# Altium PCB WSN.PcbDoc
Units mm, origin at the board's own origin, x right, y up, seen from the top; angles counter-clockwise.
Board outline 103.74 x 65.14 mm, 2 copper layers (Top Layer, Bottom Layer); 46 components, 39 nets, 171 pads, 8 vias.
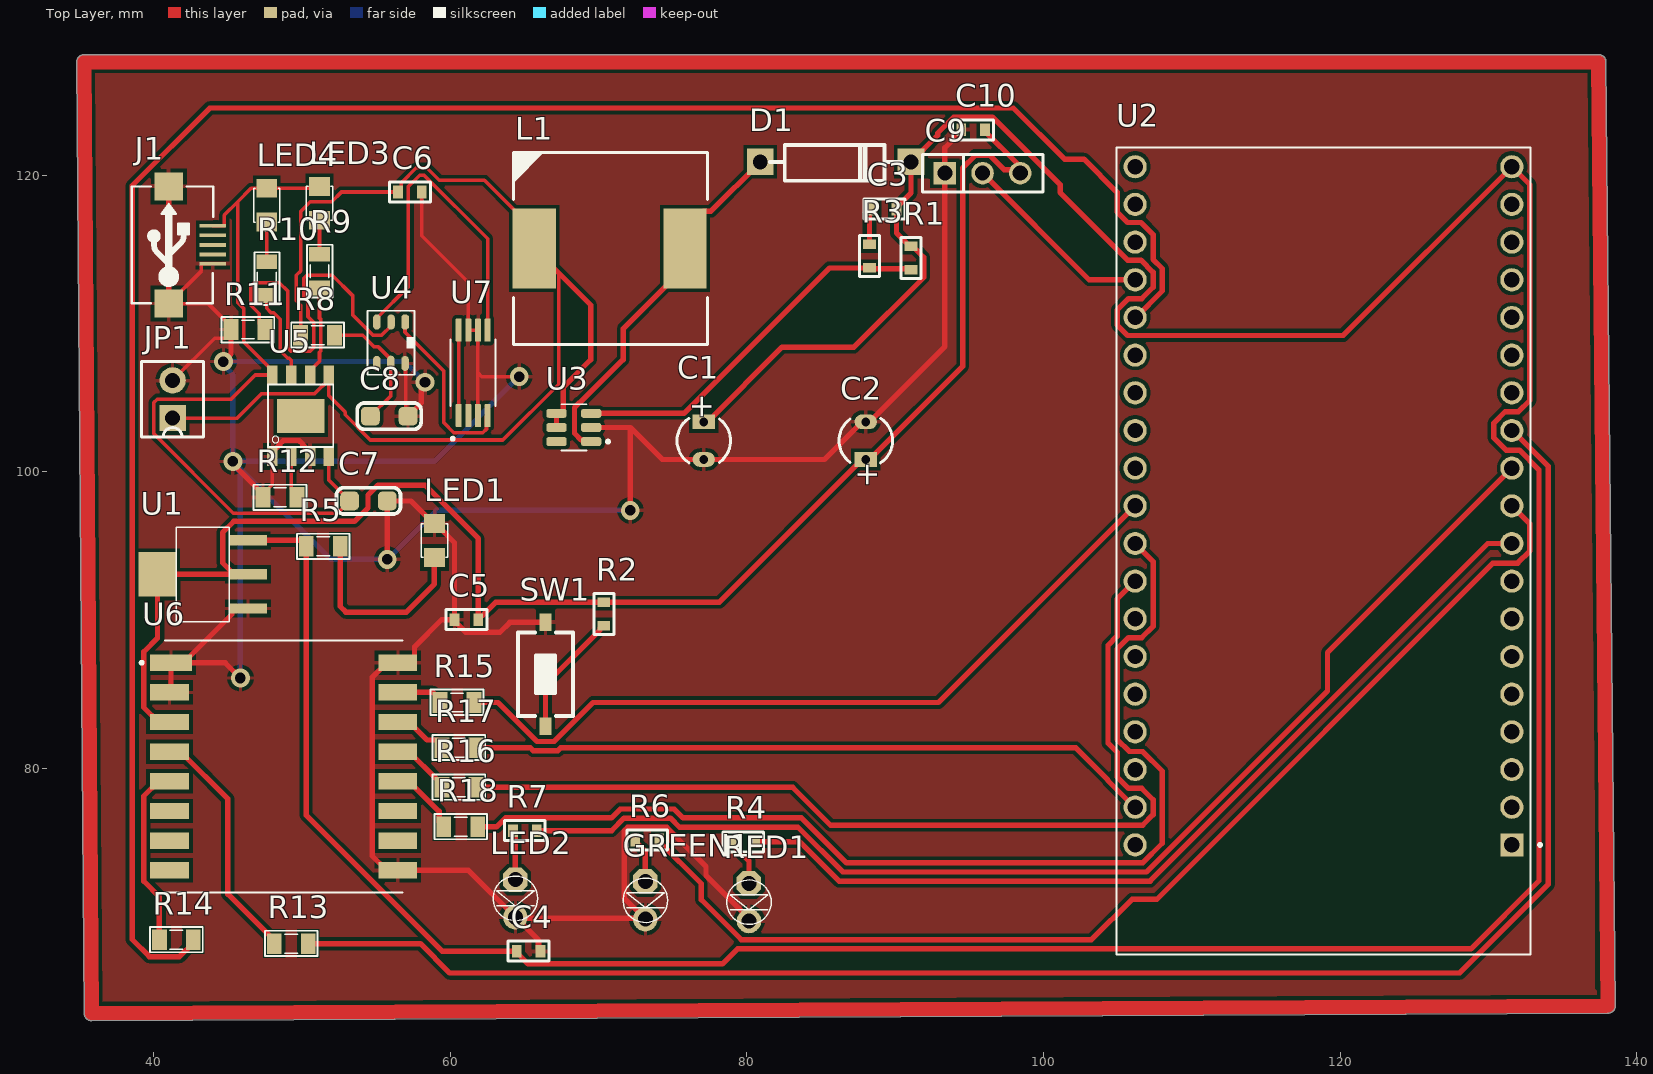
[diagram p0: Top Layer view]
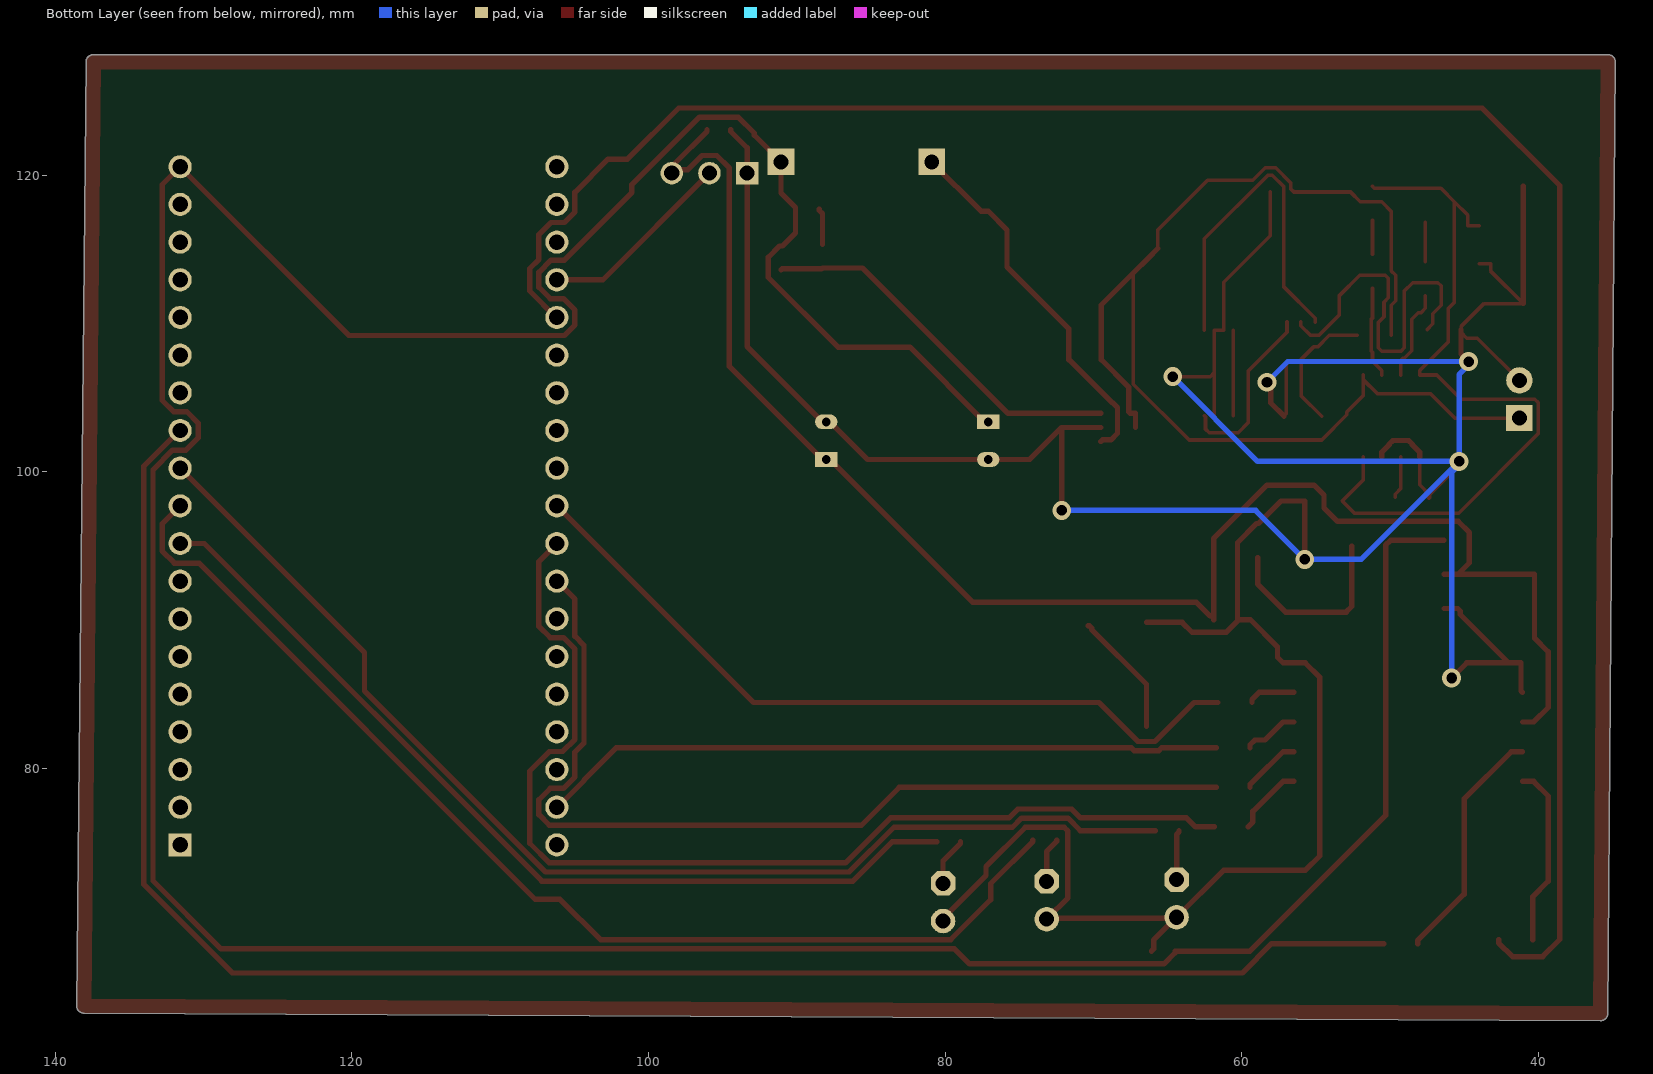
[diagram p1: Bottom Layer view, seen from below]
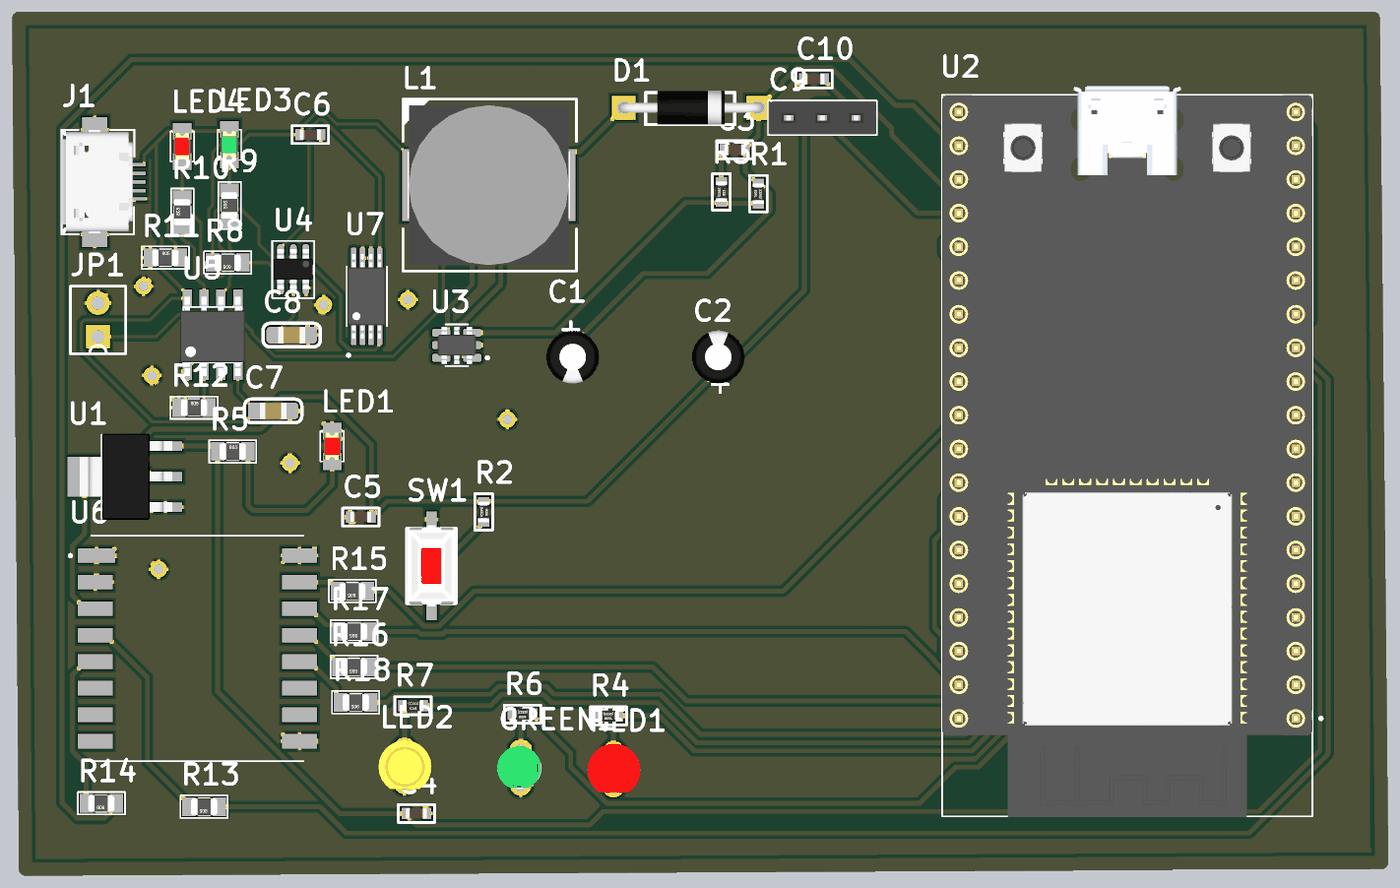
[diagram p2: 3D render of the assembled board from above, using the file's embedded part models]

## Layer stack, top to bottom
Top Solder: solder mask 0.0102, Solder Resist, Dk 3.5
Top Layer: signal copper 0.0356
Dielectric 1: dielectric 0.32, FR-4, Dk 4.8
Bottom Layer: signal copper 0.0356
Bottom Solder: solder mask 0.0102, Solder Resist, Dk 3.5

## Board outline
35.314,63.496 34.806,127.631 cw(c35.306,127.635) 35.306,128.135 137.414,128.135 cw(c137.414,127.635) 137.914,127.639 138.549,64.014 138.549,64.008 cw(c138.049,64.008) 138.051,63.508 35.816,63 cw(c35.814,63.5)

## Design rules (kind name [scope] priority, off if disabled: settings)
Clearance [All] p1: gap=0.254 ignorepadtopadclearanceinfootprint=FALSE except(0: Arc-Hole Track-Hole SMDPad-Hole THPad-Hole Via-Hole Fill-Hole Poly-Hole Region-Hole Text-Hole)
PolygonConnect [All] p1: connectstyle=Relief reliefconductorwidth=0.254 reliefentries=4 polygonreliefangle="90 Angle" airgapwidth=0.254
RoutingVias [All] p1: holewidth=0.711 width=1.27 viastyle="Through Hole" minholewidth=0.711 minwidth=1.27 maxholewidth=0.711 maxwidth=1.27
SolderMaskExpansion [All] p1: expansion=0.102 istentingtop=FALSE
Width [All] p1: maxlimit=0.36 minlimit=0.12 preferedwidth=0.24
30 further rules are at their usual default settings.

## Components (designator, comment, footprint, x,y, rotation, side; value= is the part's Value field where it differs from the comment)
C1 "10 uF" C3MM 77.089,102.108 r270 top
C2 "10 uF" C3MM 88.011,102.108 r90 top
C3 "22uF" CAP0603 89.281,117.729 r180 top
C4 "104" CAP0603 65.278,67.691 r0 top
C5 "104" CAP0603 61.087,90.043 r180 top
C6 "22uF" CAP0603 57.277,118.872 r0 top
C7 "10uF" CAP_0805 54.483,98.044 r180 top value=33p
C8 "0.1 uF" CAP_0805 55.88,103.759 r180 top value=33p
C9 "JP3" JP3-C1T 93.345,120.142 r0 top
C10 "104" CAP0603 95.25,123.063 r180 top
D1 "SS54" DIODE/POW/1A 80.899,120.904 r0 top
GREEN1 "LED" LED-3MM-GREEN 73.152,72.39 r270 top value="LED 3 ly Single Colour"
J1 "USB-5" USB-M1 43.989,115.303 r90 top
JP1 "JP2" CON2 41.275,103.632 r180 top value="Connector 2"
L1 "22uH" IND_400_500_212x114_SMD 70.739,115.062 r0 top
LED1 "LED" LED-0805-Red 58.928,94.234 r90 top value="LED 3 ly Single Colour"
LED2 "LED" LED-3MM-YELLOW 64.389,72.517 r270 top value="LED 3 ly Single Colour"
LED3 "LED" LED-0805-Green 51.181,119.253 r270 top value="LED 3 ly Single Colour"
LED4 "LED" LED-0805-Red 47.625,119.126 r270 top value="LED 3 ly Single Colour"
R1 "110K" RES0603 91.059,114.427 r90 top value=1K
R2 "1.1K" RES0603 70.358,90.424 r270 top value=1K
R3 "110K" RES0603 88.265,114.554 r270 top value=1K
R4 "1.1K" RES0603 79.756,75.057 r180 top value=1K
R5 "330" RES-SMD-0805 51.435,94.996 r0 top
R6 "1.1K" RES0603 73.279,75.184 r180 top value=1K
R7 "1.1K" RES0603 65.024,75.819 r180 top value=1K
R8 "100" RES-SMD-0805 51.054,109.22 r180 top
R9 "1k" RES-SMD-0805 51.181,113.538 r90 top
R10 "1k" RES-SMD-0805 47.625,113.03 r90 top
R11 "1k" RES-SMD-0805 46.355,109.601 r0 top
R12 "1.2k" RES-SMD-0805 48.514,98.298 r0 top
R13 "1K" RES-SMD-0805 49.276,68.199 r180 top
R14 "1K" RES-SMD-0805 41.529,68.453 r180 top
R15 "1K" RES-SMD-0805 60.452,84.455 r180 top
R16 "1K" RES-SMD-0805 60.579,78.74 r180 top
R17 "1K" RES-SMD-0805 60.579,81.407 r180 top
R18 "1K" RES-SMD-0805 60.706,76.073 r180 top
RED1 "LED" LED-3MM-RED 80.137,72.263 r270 top value="LED 3 ly Single Colour"
SW1 "SW" SW1-SMD 66.421,86.36 r90 top value="SW chip 2 pin"
U1 "LM1117-ADJ" LM1117-SOP 45.085,93.091 r90 top
U2 "ESP32-DEVKITC-32D" MODULE_ESP32-DEVKITC-32D 118.872,94.615 r180 top
U3 "MT3608" SOT95P280X145-6N 68.326,102.997 r180 top
U4 "DW01A" SOT23-6 56.124,108.6 r270 top
U5 "TP4056" TP4056 49.911,103.784 r90 top
U6 "RA-02_LORA" MODULE_RA-02_LORA 48.768,80.137 r0 top
U7 "FS8205A" FS8205A 61.595,106.68 r90 top

## Footprints (in the part's own frame and the unit in brackets; to place one, negate y for a bottom-side part, rotate by r counter-clockwise, add the part's x,y. Pads: shape width x height; smd on the part's side, far side on the other; paste and mask are expansions set on the pad)
C3MM [mm]
  rect 1x1.5 hole 0.6: 1(-1.27,0)
  oval 1x1.5 hole 0.6: 2(1.27,0)
  silkscreen extent -1.5,-1.81 1.5,1.8, body extent -2,-2.03 1.99,1.97, height 7.01
CAP0603 [mm]
  rect 0.65x0.85 smd: 1(-0.8,0) 2(0.8,0)
  silkscreen extent -1.38,-0.67 1.38,0.67, body extent -0.8,-0.4 0.8,0.4, height 0.79
CAP_0805 [mm]
  rrect50% 1.27x1.27 smd: 1(-1.27,0) 2(1.27,0)
  silkscreen extent -2.16,-0.89 2.16,0.89, body extent -1.01,-0.64 1.01,0.64, height 0.61
CON2 [mil]
  rect 70x70 hole 39.37 unplated: 1(0,0)
  round 70 hole 39.37 unplated: 2(0,-100)
  silkscreen extent -82,-150 82,50
DIODE/POW/1A [mm]
  rect 1.8x1.8 hole 1: 1(0,0) 2(10.16,0)
  silkscreen extent 0.64,-1.27 9.53,1.14, body extent -0.38,-1.28 10.54,1.28, height 2.55
FS8205A [mm]
  rrect25% 1.56x0.4 smd: 1(-2.88,1.031) 2(-2.88,0.381) 3(-2.88,-0.269) 4(-2.88,-0.919) 5(2.88,-0.919) 6(2.88,-0.269) 7(2.88,0.381) 8(2.88,1.031)
  silkscreen extent -4.54,-1.46 2.25,1.57, body extent -3.2,-1.4 3.2,1.53, height 1.2
IND_400_500_212x114_SMD [mm] "wurth inductor"
  rect 2.9x5.4 smd: 1(-5.08,0) 2(5.08,0)
  silkscreen extent -6.48,-6.48 6.6,6.48, body extent -6.12,-6.02 6.13,6.03, height 8.1
JP3-C1T [mm]
  rect 1.52x1.52 hole 1.02: 1(0,0)
  round 1.52 hole 1.02: 2(2.54,0) 3(5.08,0)
  silkscreen extent -1.52,-1.27 6.6,1.27, body extent -1.52,-1.25 6.6,1.25, height 8.51
LED-3MM-GREEN [mil]
  oct 65x65 hole 40: 1(0,0)
  round 65 hole 40: 2(100,0)
  silkscreen extent -9,-59 109,59, body extent -15,-70 112,60, height 182
LED-3MM-RED [mil]
  oct 65x65 hole 40: 1(0,0)
  round 65 hole 40: 2(100,0)
  silkscreen extent -9,-59 109,59, body extent -27,-77 117,80, height 181
LED-3MM-YELLOW [mil]
  oct 65x65 hole 40: 1(0,0)
  round 65 hole 40: 2(100,0)
  silkscreen extent -9,-59 109,59, body extent -27,-77 117,80, height 181
LED-0805-Green [mil]
  rect 50x55 smd: 1(0,0) 2(90,0)
  silkscreen extent 0,-35 90,35, body extent 5,-25 85,25, height 43
LED-0805-Red [mil]
  rect 50x55 smd: 1(0,0) 2(90,0)
  silkscreen extent 0,-35 90,35, body extent 5,-25 85,25, height 43
LM1117-SOP [mm]
  rect 0.7x2.54 smd: 1(-2.3,-1.27) 2(0,-1.27) 3(2.3,-1.27)
  rect 3x2.54 smd: 2(0,4.826)
  silkscreen extent -3.18,0 3.17,3.56, body extent -3.25,-1.78 3.25,5.18, height 1.68
MODULE_ESP32-DEVKITC-32D [mm]
  rect 1.56x1.56 / inner round 1.56 / far side rect 1.56x1.56 hole 1.04: J2-1(-12.7,19.76)
  round 1.56 hole 1.04: J2-2(-12.7,17.22) J2-3(-12.7,14.68) J2-4(-12.7,12.14) J2-5(-12.7,9.6) J2-6(-12.7,7.06) J2-7(-12.7,4.52) J2-8(-12.7,1.98) J2-9(-12.7,-0.56) J2-10(-12.7,-3.1) J2-11(-12.7,-5.64) J2-12(-12.7,-8.18) J2-13(-12.7,-10.72) J2-14(-12.7,-13.26) J2-15(-12.7,-15.8) J2-16(-12.7,-18.34) J2-17(-12.7,-20.88) J2-18(-12.7,-23.42) J2-19(-12.7,-25.96) J3-1(12.7,19.76) J3-2(12.7,17.22) J3-3(12.7,14.68) J3-4(12.7,12.14) J3-5(12.7,9.6) J3-6(12.7,7.06) J3-7(12.7,4.52) J3-8(12.7,1.98) J3-9(12.7,-0.56) J3-10(12.7,-3.1) J3-11(12.7,-5.64) J3-12(12.7,-8.18) J3-13(12.7,-10.72) J3-14(12.7,-13.26) J3-15(12.7,-15.8) J3-16(12.7,-18.34) J3-17(12.7,-20.88) J3-18(12.7,-23.42) J3-19(12.7,-25.96)
  silkscreen extent -14.7,-27.25 13.95,27.15, body extent -13.97,-27.9 13.97,27.2, height 6.69
MODULE_RA-02_LORA [mm]
  rect 2.8x1.1 smd: 1(-7.6,7)
  rect 2.6x1.1 smd: 2(-7.7,5) 3(-7.7,3) 4(-7.7,1) 5(-7.7,-1) 6(-7.7,-3) 7(-7.7,-5) 8(-7.7,-7) 9(7.7,-7) 10(7.7,-5) 11(7.7,-3) 12(7.7,-1) 13(7.7,1) 14(7.7,3) 15(7.7,5) 16(7.7,7)
  silkscreen extent -9.68,-8.5 8,8.5
RES0603 [mm]
  rect 0.65x0.85 smd: 1(-0.8,0) 2(0.8,0)
  silkscreen extent -1.38,-0.67 1.38,0.67, body extent -0.78,-0.42 0.77,0.43, height 0.45
RES-SMD-0805 [mil]
  rect 39.37x55 smd: 1(-45,0) 2(45,0)
  silkscreen extent -70,-34 70,33, body extent -39,-25 39,25, height 31
SOT23-6 [mil]
  oct 40x20 smd: 1(-59.41,32.4)
  oval 40x20 smd: 2(-59.41,-4.6) 3(-59.41,-42.6) 4(50.59,-42.6) 5(50,-5) 6(50.59,32.4)
  silkscreen extent -89,-68 81,57, body extent -64,-64 54,54, height 51
SOT95P280X145-6N [mm]
  rrect50% 1.37x0.59 smd: 1(-1.17,0.95) 2(-1.17,0) 3(-1.17,-0.95) 4(1.17,-0.95) 5(1.17,0) 6(1.17,0.95)
  silkscreen extent -2.4,-1.57 0.85,1.57, body extent -1.45,-1.4 1.45,1.4, height 1.45
SW1-SMD [mm]
  rect 1.2x0.8 smd: 1(-3.5,0) 2(3.5,0)
  silkscreen extent -2.82,-1.85 2.82,1.85, body extent -3.05,-1.85 3.05,1.85, height 2.5
TP4056 [mm]
  rect 1.3x0.7 smd: 1(-2.75,1.905) 2(-2.75,0.635) 3(-2.75,-0.635) 4(-2.75,-1.905) 5(2.75,-1.905) 6(2.75,-0.635) 7(2.75,0.635) 8(2.75,1.905)
  rect 2.3x3.2 smd: GND(-0.025,0)
  silkscreen extent -2.1,-2.2 2.1,2.2, body extent -3.13,-2.45 2.87,2.45, height 1.75
USB-M1 [mil]
  rect 10x70 smd: 1(51.18,0) 2(25.59,0) 3(0,0) 4(-25.59,0) 5(-50,0)
  rect 74.8x74.8 smd: 5(-155.51,116.84) 5(155.51,116.84)
  silkscreen extent -155,-1 155,215, body extent -157,5 158,218, height 107

## Part data
C1 C2: library part "Cap Pol", "Polarized Capacitor (Axial)", LatestRevisionDate=17-Jul-2002, LatestRevisionNote="Re-released for DXP Platform.", PackageReference=POLAR0.8, Published=8-Jun-2000, Publisher="Altium Limited"
C3 C4 C5 C6 C10: library part CC0603JRNPO9BN300, "CAP CER 30PF 50V NPO 0603", Manufacturer=Yageo, Operating Temperature="-55°C ~ 125°C", Package / Case="0603 (1608 Metric)", Ratings=-, Supplier Part Number 1=311-3357-1-ND, Temperature Coefficient="C0G, NP0", Tolerance=±5%, Voltage - Rated=50V, Applications="General Purpose", Category=Capacitors, ComponentLink1Description=http://www.yageo.com/documents/recent/UPY-GP_NP0_16V-to-50V_16.pdf, ComponentLink1URL=http://www.yageo.com/documents/recent/UPY-GP_NP0_16V-to-50V_16.pdf, Failure Rate=-, Features=-, Height - Seated (Max)=-, Lead Spacing=-, Lead Style=-, Manufacturer Part Number=CC0603JRNPO9BN300, Mounting Type="Surface Mount, MLCC", Notification="Current market demand for these product types have resulted in fluctuating and extending lead times. Lead times may differ.", Packaging="Cut Tape (CT)", Part Status=Active, Pricing 1="1=0.1, 10=0.041, 100=0.0182, 500=0.01302, 1000=0.01022 (USD)", RoHS="RoHS Compliant", Size / Dimension="0.063\" L x 0.032\" W (1.60mm x 0.80mm)", Stock 1=0, Supplier 1=Digi-Key, Thickness (Max)="0.035\" (0.90mm)"
C7 C8: library part CapSMD, "Capacitor", LatestRevisionDate=17-Jul-2002, LatestRevisionNote="Re-released for DXP Platform.", PackageReference=RAD-0.3, Published=8-Jun-2000, Publisher="Altium Limited"
C9: "WR-PHD 2.54 mm Angled Socket Header", Manufacturer="W¨¹rth Elektronik eiSos GmbH", partNo=613003143121, ComponentLink1 Description=Manufacturer, ComponentLink1URL=http://www.we-online.com, ComponentLink2 Description=Datasheet, ComponentLink2URL=http://katalog.we-online.de/em/datasheet/6130xx143121.pdf, Created by="Karrer Zheng", Created Date="29 March 2013", NoPins=03
D1: library part "Diode Power", "Diode Power", PackageDocument=Aug-1999, ComponentLink1Description="Manufacturer Link", ComponentLink1URL=http://www.fairchildsemi.com/, ComponentLink2Description=Datasheet, ComponentLink2URL=http://www.fairchildsemi.com/ds/1N%2F1N5400.pdf, DatasheetDocument=1998, LatestRevisionDate=17-Jul-2002, LatestRevisionNote="Re-released for DXP Platform.", PackageReference=DO-201AD, Published=8-Jun-2000, Publisher="Altium Limited"
GREEN1 LED1 LED2 LED3 LED4 RED1: "LED Single colour Green and Red"
J1: Manufacturer=FCI, Manufacturer Part Number=10118193-0001LF, Supplier Part Number 1=609-4616-1-ND, .Checked PCB=RF, .Checked SCH=MM, .Creator=MM, Category="Connectors, Interconnects", ComponentLink1Description=http://portal.fciconnect.com/Comergent//fci/drawing/10118193.pdf, ComponentLink1URL=http://portal.fciconnect.com/Comergent//fci/drawing/10118193.pdf, Connector Type="USB - micro B", Features="Shielded, Solder Retention", Gender=Receptacle, Ingress Protection=-, Mounting Type="Surface Mount, Right Angle, Horizontal", Number of Contacts=5, Packaging="Cut Tape (CT)", Pricing 1="1=0.46, 10=0.433, 25=0.3712, 50=0.3156, 100=0.3032, 250=0.27224, 500=0.25988 (USD)", RoHS="RoHS Compliant", Specifications="USB 2.0", Stock 1=28642, Supplier 1=Digi-Key
JP1: library part Con2, "Connector 2"
L1: library part IND_1mH-0.6A-20%-SMD, "1mH Shielded Wirewound Inductor 600mA 1.82Ohm Max Nonstandard", Alternate Part Number-1=NA, Case/Package=SMD, Manufacturer=Coilcraft, Manufacturer Part Number=74477030, Supplier Part Number-1=74477030, Supplier-1=WURTH
R1 R2 R3 R4 R6 R7: library part RT0603FRD071KL, "RES SMD 1K OHM 1% 1/10W 0603", Manufacturer=Yageo, Operating Temperature="-55°C ~ 155°C", Package / Case="0603 (1608 Metric)", Power (Watts)="0.1W, 1/10W", Supplier Device Package=0603, Supplier Part Number 1=YAG5719CT-ND, Temperature Coefficient=±25ppm/°C, Tolerance=±1%, Category=Resistors, ComponentLink1Description=http://www.yageo.com/documents/recent/PYu-RT_1-to-0.01_RoHS_L_9.pdf, ComponentLink1URL=http://www.yageo.com/documents/recent/PYu-RT_1-to-0.01_RoHS_L_9.pdf, Composition="Thin Film", Failure Rate=-, Features="Moisture Resistant", Height - Seated (Max)="0.022\" (0.55mm)", Manufacturer Part Number=RT0603FRD071KL, Packaging="Cut Tape (CT)", Part Status=Active, Pricing 1="1=0.17, 10=0.143, 100=0.0561, 1000=0.02346, 2500=0.02151 (USD)", RoHS="RoHS Compliant", Size / Dimension="0.063\" L x 0.032\" W (1.60mm x 0.80mm)", Stock 1=0, Supplier 1=Digi-Key
R5 R8 R9 R10 R11 R12 R13 R14 R15 R16 R17 R18: library part "Resistor - SMD", "Resistor", Manufacturer="Generic Components", Class=Passive, Published=08/06/2000, Publisher="Altium Hobart Technology Centre"
SW1: library part SW2, "Switch button 2 pin"
U1: "800mA Low-Dropout Linear Regulator", Creator="Nguyen Ba Bien", Website=http://group3i.net
U2: "WiFi Development Tools (802.11) ESP32 General Development Kit, ESP32-WROOM-32D on the board", Package=None, Check_prices=https://www.snapeda.com/parts/ESP32-DEVKITC-32D/Espressif+Systems/view-part/?ref=eda, MF="Espressif Systems", MP=ESP32-DEVKITC-32D, SnapEDA_Link=https://www.snapeda.com/parts/ESP32-DEVKITC-32D/Espressif+Systems/view-part/?ref=snap
U3: "High Efficiency 1.2MHz2A Step Up Converter", Package=Package, Availability="Not in stock", Check_prices=https://www.snapeda.com/parts/MT3608/Aerosemi+Technology+Co.%252C+Ltd/view-part/?ref=eda, MF="Aerosemi Technology Co., Ltd", MP=MT3608, Price=None, SnapEDA_Link=https://www.snapeda.com/parts/MT3608/Aerosemi+Technology+Co.%252C+Ltd/view-part/?ref=snap
U4: "One Cell Lithium-ion/Polymer Battery Protection IC"
U5: "Complete single cell Li-Ion battery with a constant current / constant voltage linear charger"
U6: "Ra-02 LoRa RF M5Stack Platform Evaluation Expansion Board", Package=None, Availability=Unavailable, MP=RA-02_LORA, Price=None

## Via types
v1: diameter 1.27, hole 0.711, Top Layer to Bottom Layer, 8 vias

## Nets (pads, with @x,y where several pads share a name; then routed paths per layer and width w, separated by ;. In a path a pad name is that pad's centre, name@x,y a point inside that pad or via, vN(x,y) a via of type N, cw(c..) or ccw(c..) an arc to the next point about the centre after c; other vN are vias at no path point)
3V3: C2.1 C5.1 C9.3 C10.1 R2.1 U1.2 U6.3 | length 107.7
  Top Layer w0.36: U6.3 40.318,83.137 39.334,84.121 39.334,87.867 40.259,88.792 40.259,93.091 U1.2@45.435,93.091 ; U1.2@46.355,93.091 U1.2@45.435,93.091 ; C5.1 C5.1@61.887,90.143 ; C10.1 96.05,122.963 C9.3@98.203,120.81 ; C9.3 98.203,120.364 97.352,120.364 96.38,121.336 95.39,121.336 94.539,120.485 94.539,107.116 88.261,100.838 C2.1 87.761,100.838 78.147,91.224 R2.1 63.068,91.224 62.132,90.288 62.032,90.288 C5.1@61.887,90.143 ; U1.2@45.435,93.091 44.651,93.875 44.651,95.921 45.402,96.672 53.538,96.672 54.446,97.579 54.446,98.435 55.124,99.113 58.282,99.113 61.887,95.508 C5.1@61.887,90.143
5V: C1.1 C3.1 C4.1 D1.2 R1.2 R5.1 U1.3 U2.J2-19 | length 250.8
  Top Layer w0.36: U1.3 49.972,95.391 50.292,95.071 R5.1 50.292,76.849 59.45,67.691 C4.1 64.478,67.591 65.237,66.832 78.343,66.832 79.361,67.85 128.81,67.85 133.4,72.44 133.4,100.144 132.075,101.469 131.181,101.469 130.358,102.292 130.358,103.298 131.125,104.065 132.019,104.065 132.786,104.832 132.786,119.361 U2.J2-19 120.198,109.201 105.669,109.201 104.958,109.912 104.958,110.918 105.725,111.685 106.619,111.685 107.386,112.452 107.386,113.458 106.563,114.281 105.669,114.281 101.112,118.838 101.112,119.365 96.555,123.922 93.945,123.922 92.862,122.839 92.862,122.707 D1.2 91.059,118.807 90.081,117.829 C3.1 90.081,116.105 90.959,115.227 R1.2 91.159,115.227 91.918,114.468 91.918,113.122 87.206,108.41 82.371,108.41 77.339,103.378 C1.1
Data: C9.2 U2.J3-16 | length 13.3
  Top Layer w0.36: C9.2 103.072,112.955 U2.J3-16
DIO0: R14.2 U6.5 | length 12.3
  Top Layer w0.36: R14.2 40.386,71.355 39.334,72.407 39.334,78.153 40.318,79.137 U6.5
GND: C1.2 C2.2 C4.2 C5.2 C6.2 C7.1 C8.1 C9.1 C10.2 GREEN1.2 J1.5 JP1.2 LED1.2 LED2.2 R11.1 R12.1 RED1.2 SW1.2 U1.1 U3.2 U4.6 U5.1 U5.3 U6.1 U6.2 U6.9 U6.16 U7.2 U7.3 U7.6 U7.7 | length 293.1
  Top Layer w0.24: JP1.2 44.125,109.022 44.832,109.022 R11.1@45.212,109.403 ; J1.5@43.989,114.033 43.227,114.033 43.22,114.026 43.22,113.552 41.021,111.353 43.658,111.353 45.212,109.799 R11.1 ; R12.1@47.371,98.496 48.006,99.132 U5.1 ; U4.6 56.998,107.264 C8.1@56.998,103.911 ; C6.2 58.077,115.924 61.214,112.787 U7.7 U7.6 61.864,106.68 ; U7.3 61.864,106.68 ; v1(64.643,106.426) 62.118,106.426 61.864,106.68
  Top Layer w0.36: J1.5@41.021,111.353 J1.5@41.021,119.253 ; U6.2 41.168,85.237 U6.1 U6.1@42.018,87.137 ; v1(44.704,107.442) 45.212,107.95 45.212,109.403 R11.1 ; v1(45.339,100.711) 45.339,100.528 47.371,98.496 R12.1 ; v1(45.847,86.106) 44.816,87.137 U6.1@42.018,87.137 ; U1.1 45.435,90.791 45.265,90.621 45.265,90.384 U6.1@42.018,87.137 ; U5.1 48.006,101.334 48.492,101.82 48.492,101.864 48.746,102.118 49.806,102.118 50.06,101.864 50.06,101.82 50.546,101.334 U5.3 ; v1(55.753,94.107) C7.1 57.34,98.044 58.864,96.52 LED1.2 58.991,96.52 60.287,95.225 C5.2 ; C8.1 58.039,104.648 58.039,105.537 v1@58.166,105.664 ; C4.2 65.933,67.836 65.933,68.433 LED2.2@64.453,69.913 ; SW1.2 64.012,89.86 63.335,89.184 61.046,89.184 60.287,89.943 C5.2 ; U3.2 72.135,102.997 ; v1(72.136,97.409) 72.135,102.997 ; GREEN1.2 GREEN1.2@73.088,69.913 ; RED1.2 80.137,69.894 77.237,72.794 77.237,73.39 74.584,76.043 71.974,76.043 71.72,75.789 71.72,71.282 GREEN1.2@73.088,69.913 ; C10.2 94.45,122.963 93.345,121.858 C9.1 93.345,108.462 88.261,103.378 C2.2 87.761,103.378 85.221,100.838 C1.2 74.294,100.838 72.135,102.997 ; C5.2 59.422,90.043 57.588,88.209 57.588,87.507 57.218,87.137 U6.16 55.718,87.137 54.734,86.153 54.734,74.121 55.718,73.137 U6.9 61.229,73.137 LED2.2 LED2.2@64.453,69.913 ; LED2.2@64.453,69.913 GREEN1.2@73.088,69.913
  Bottom Layer w0.36: v1(45.847,86.106) 45.847,99.957 45.339,100.465 v1(45.339,100.711) ; v1(58.293,106.045) 56.896,107.442 v1(44.704,107.442) 44.704,107.196 45.339,106.561 v1(45.339,100.711) ; v1(64.643,106.426) 58.928,100.711 v1(45.339,100.711) ; v1(72.136,97.409) 59.055,97.409 v1(55.753,94.107) 51.943,94.107 v1(45.339,100.711)
IO2: R14.1 U2.J3-15 | length 137.9
  Top Layer w0.36: R14.1 42.672,68.255 41.738,67.321 39.706,67.321 38.555,68.472 38.555,119.301 43.79,124.536 97.954,124.536 101.404,121.086 102.719,121.086 104.958,118.847 104.958,117.532 105.669,116.821 106.563,116.821 107.386,115.998 107.386,114.326 108,113.712 108,112.198 106.217,110.415 U2.J3-15
IO5: R15.1 U2.J3-10 | length 52.2
  Top Layer w0.36: R15.1 63.212,84.455 65.841,81.826 67.001,81.826 69.63,84.455 92.912,84.455 U2.J3-10
IO14: R13.1 U2.J2-12 | length 118.5
  Top Layer w0.36: R13.1 57.977,68.199 59.958,66.218 128.046,66.218 134.014,72.186 134.014,100.398 131.617,102.795 U2.J2-12
IO18: R18.1 U2.J3-9 | length 72.7
  Top Layer w0.36: R18.1 63.114,76.073 63.719,76.678 70.873,76.678 71.466,77.271 75.092,77.271 75.685,76.678 83.679,76.678 86.716,73.641 106.675,73.641 108,74.966 108,79.824 106.675,81.149 105.781,81.149 104.958,81.972 104.958,88.058 105.725,88.825 106.619,88.825 107.386,89.592 107.386,93.961 U2.J3-9
IO19: R16.1 U2.J3-8 | length 65.3
  Top Layer w0.36: R16.1 83.079,78.74 85.638,76.181 106.675,76.181 107.386,76.892 107.386,77.898 106.619,78.665 105.725,78.665 104.958,79.432 104.958,81.104 104.344,81.718 104.344,88.312 104.958,88.926 104.958,91.421 U2.J3-8
IO23: R17.1 U2.J3-2 | length 46.3
  Top Layer w0.36: R17.1 65.392,81.407 65.587,81.212 67.255,81.212 67.45,81.407 102.16,81.407 104.344,79.223 104.344,79.178 106.127,77.395 U2.J3-2
MISO: R16.2 U6.13 | length 4.1
  Top Layer w0.36: U6.13 57.218,81.137 59.096,79.259 59.116,79.259 59.436,78.938 R16.2
MOSI: R17.2 U6.14 | length 3.8
  Top Layer w0.36: U6.14 57.218,83.137 58.429,81.926 59.116,81.926 59.436,81.605 R17.2
NetC3_2: C3.2 R3.1 | length 2.5
  Top Layer w0.36: R3.1 88.265,117.413 88.481,117.629 C3.2
NetC8_2: C8.2 R8.1 U4.5 | length 8.9
  Top Layer w0.24: R8.1 54.09,109.22 54.882,108.428 55.153,108.428 55.997,107.584 U4.5 55.997,105.146 C8.2
NetD1_1: D1.1 L1.2 U3.1 | length 25.1
  Top Layer w0.36: U3.1 69.381,102.162 68.824,102.162 68.377,102.609 68.377,104.335 68.718,104.676 68.753,104.676 71.651,107.574 71.651,109.644 75.819,113.812 75.819,116.312 77.089,117.582 77.577,117.582 D1.1
NetGREEN1_1: GREEN1.1 R6.2 | length 3.1
  Top Layer w0.36: R6.2 72.479,75.084 73.152,74.411 GREEN1.1
NetLED1_1: LED1.1 R5.2 | length 13.1
  Top Layer w0.36: R5.2 52.578,90.932 52.959,90.551 57.038,90.551 58.928,92.441 LED1.1
NetLED2_1: LED2.1 R7.2 | length 3.4
  Top Layer w0.36: R7.2 64.224,75.719 64.389,75.554 LED2.1
NetLED3_2: LED3.2 R9.2 | length 2.3
  Top Layer w0.24: R9.2 LED3.2
NetLED4_2: LED4.2 R10.2 | length 2.7
  Top Layer w0.24: R10.2 LED4.2
NetR1_1: R1.1 R3.2 U3.3 | length 25.7
  Top Layer w0.36: U3.3 75.753,103.947 85.56,113.754 R3.2 88.329,113.69 90.995,113.69 R1.1
NetR4_2: R4.2 RED1.1 | length 3.3
  Top Layer w0.36: R4.2 78.956,74.957 80.137,73.776 RED1.1
NetR9_1: R9.1 U5.6 | length 6.2
  Top Layer w0.24: U5.6 50.546,106.834 51.181,107.469 51.181,108.064 51.279,108.162 51.279,110.278 51.181,110.376 R9.1
NetR10_1: R10.1 U5.7 | length 6.2
  Top Layer w0.24: R10.1 47.625,111.027 47.911,110.741 48.086,110.741 48.543,110.283 48.543,108.162 49.052,107.654 49.135,107.654 49.276,107.513 U5.7
NetR11_2: R11.2 U4.2 | length 25.8
  Top Layer w0.24: R11.2 47.118,109.981 47.118,110.667 46.553,111.232 46.553,112.542 46.772,112.761 48.478,112.761 49.037,112.202 49.037,108.367 49.256,108.148 50.566,108.148 50.785,108.367 50.785,110.073 50.405,110.453 50.405,111.444 50.109,111.74 50.109,113.05 50.328,113.269 52.034,113.269 53.408,111.895 53.408,110.601 54.782,109.227 55.379,109.227 56.007,109.855 U4.2
NetR12_2: R12.2 U5.2 | length 2.9
  Top Layer w0.24: U5.2 49.276,98.877 49.657,98.496 R12.2
NetU4_1: U4.1 U7.4 | length 12.1
  Top Layer w0.24: U4.1 56.947,109.423 59.572,106.798 59.572,103.312 60.238,102.646 62.19,102.646 62.438,102.894 62.438,103.724 U7.4
NetU4_3: U4.3 U7.5 | length 23.6
  Top Layer w0.24: U4.3 55.042,110.363 57.176,112.497 57.176,119.25 57.929,120.003 58.225,120.003 62.514,115.714 U7.5
NetU7_1: U7.1 U7.8 | length 5.8
  Top Layer w0.24: U7.1 U7.8
NSS: R15.2 U6.15 | length 3.2
  Top Layer w0.36: U6.15 58.826,85.137 59.309,84.653 R15.2
P13: R2.2 SW1.1 | length 8.5
  Top Layer w0.36: SW1.1 66.421,85.687 70.113,89.379 70.113,89.479 70.258,89.624 R2.2
P25: R4.1 U2.J2-9 | length 61.5
  Top Layer w0.36: R4.1 83.563,75.057 86.207,72.413 107.184,72.413 129.946,95.175 v1(131.572,95.175)
P26: R6.1 U2.J2-10 | length 76.6
  Top Layer w0.36: R6.1 74.079,75.084 76.92,72.243 76.92,71.159 79.615,68.464 103.234,68.464 105.956,71.185 107.627,71.185 130.291,93.849 131.963,93.849 132.786,94.672 132.786,96.501 U2.J2-10
P27: R7.1 U2.J2-11 | length 80.4
  Top Layer w0.36: R7.1 70.882,75.819 71.72,76.657 74.838,76.657 75.452,76.043 83.445,76.043 86.461,73.027 106.929,73.027 119.136,85.234 119.136,87.819 U2.J2-11
RST: R13.2 U6.4 | length 16.3
  Top Layer w0.36: U6.4 41.818,81.137 45.001,77.954 45.001,71.53 48.133,68.397 R13.2
SCK: R18.2 U6.12 | length 4.8
  Top Layer w0.36: U6.12 57.218,79.137 59.243,77.112 59.243,76.393 R18.2
VBat+: C6.1 JP1.1 L1.1 R8.2 U3.4 U3.5 U5.5 | length 83.4
  Top Layer w0.24: JP1.1 45.629,103.632 47.28,105.283 50.865,105.283 U5.5@51.816,106.234 ; R8.2 49.911,111.239 49.615,111.535 49.615,113.254 49.911,113.551 49.911,117.559 50.567,118.216 52.006,118.216 52.662,118.872 C6.1 56.682,119.077 56.682,119.484 57.707,120.509 58.418,120.509 59.256,119.671 62.3,119.671 65.659,116.312 L1.1 L1.1@66.294,114.427 ; U5.5 U5.5@51.816,106.234 ; 67.31,113.411 67.31,105.918 63.544,102.152 54.604,102.152 52.911,103.845 52.911,104.038 51.816,105.133 U5.5@51.816,106.234
  Top Layer w0.36: L1.1 66.294,114.427 67.31,113.411 69.469,111.252 69.469,107.569 67.625,105.725 67.625,104.062 67.51,103.947 U3.4 U3.5
VCC: C7.2 J1.1 LED3.1 LED4.1 U5.4 U5.8 | length 51.5
  Top Layer w0.24: J1.1 44.751,116.603 44.758,116.61 44.758,117.317 45.662,118.222 ; LED3.1 51.054,119.126 LED4.1 46.567,119.126 45.662,118.222 ; U5.4 51.816,99.441 C7.2 52.395,97.226 45.375,97.226 40.012,102.588 40.012,104.676 40.245,104.909 45.219,104.909 46.844,106.534 U5.8 48.006,106.834 46.086,108.754 46.086,111 45.662,111.424 45.662,118.222
pads on no net: J1.2 J1.3 J1.4 U2.J2-1 U2.J2-2 U2.J2-3 U2.J2-4 U2.J2-5 U2.J2-6 U2.J2-7 U2.J2-8 U2.J2-13 U2.J2-14 U2.J2-15 U2.J2-16 U2.J2-17 U2.J2-18 U2.J3-1 U2.J3-3 U2.J3-4 U2.J3-5 U2.J3-6 U2.J3-7 U2.J3-11 U2.J3-12 U2.J3-13 U2.J3-14 U2.J3-17 U2.J3-18 U2.J3-19 U3.6 U4.4 U5.GND U6.6 U6.7 U6.8 U6.10 U6.11
copper on no net: | length 332.1
  Top Layer w1: 35.306,127.635 35.814,63.5 138.049,64.008 137.414,127.635 35.306,127.635

## Polygon pours and split planes (outlines as drawn)
GND on Top Layer "GND_L01_P002" (solid, remove dead copper, pour order 2): 35.306,127.635 35.433,127.508 137.16,127.508 137.16,65.151 137.922,64.389 137.287,63.754 35.814,63.754

## Text inside footprints (layer, text, board x,y; h text height)
C1: Top Overlay "+" at 76.327,105.283 h1.52 r270
C2: Top Overlay "+" at 88.773,98.933 h1.52 r90